# Altium PCB DaGooseBox_2022-08-19.pcbdoc
Units mm, origin at the board's own origin, x right, y up, seen from the top; angles counter-clockwise.
Board outline 135.65 x 95.65 mm, 2 copper layers (Top Layer, Bottom Layer); 48 components, 39 nets, 138 pads, 3 vias.
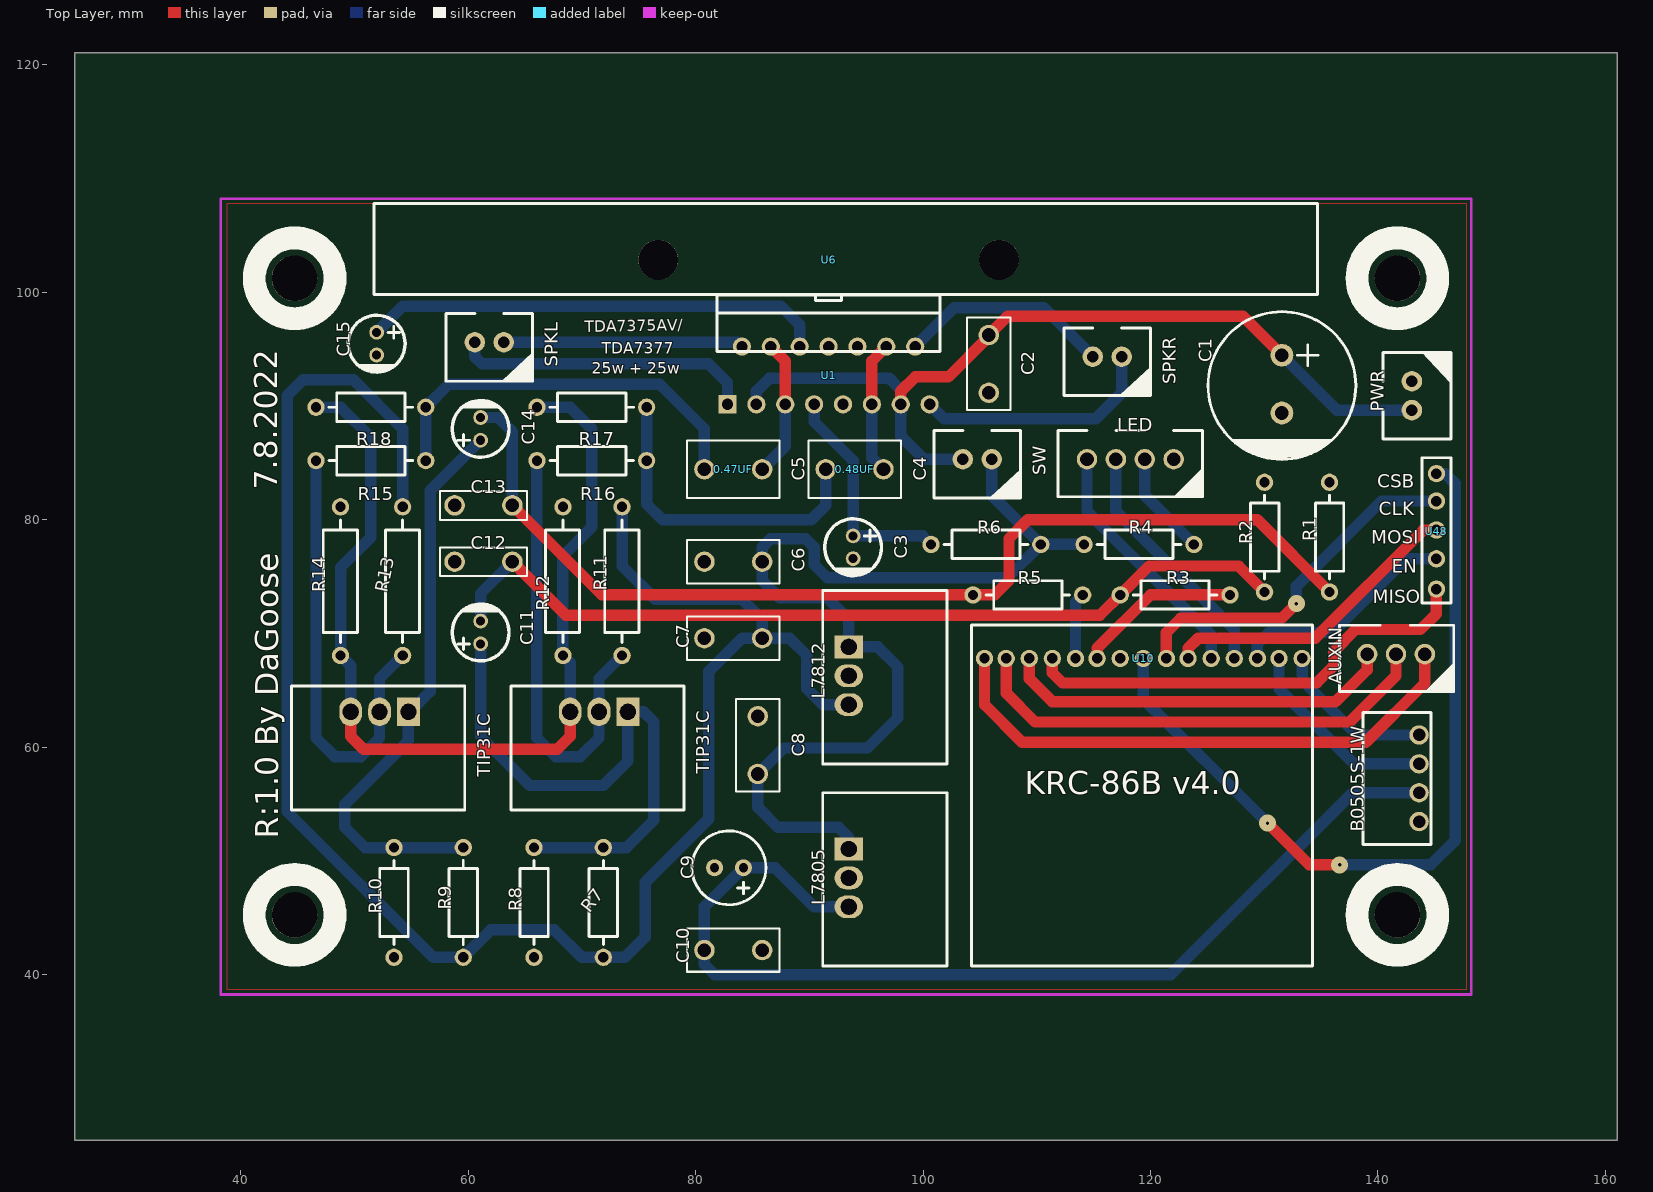
[diagram p0: Top Layer view]
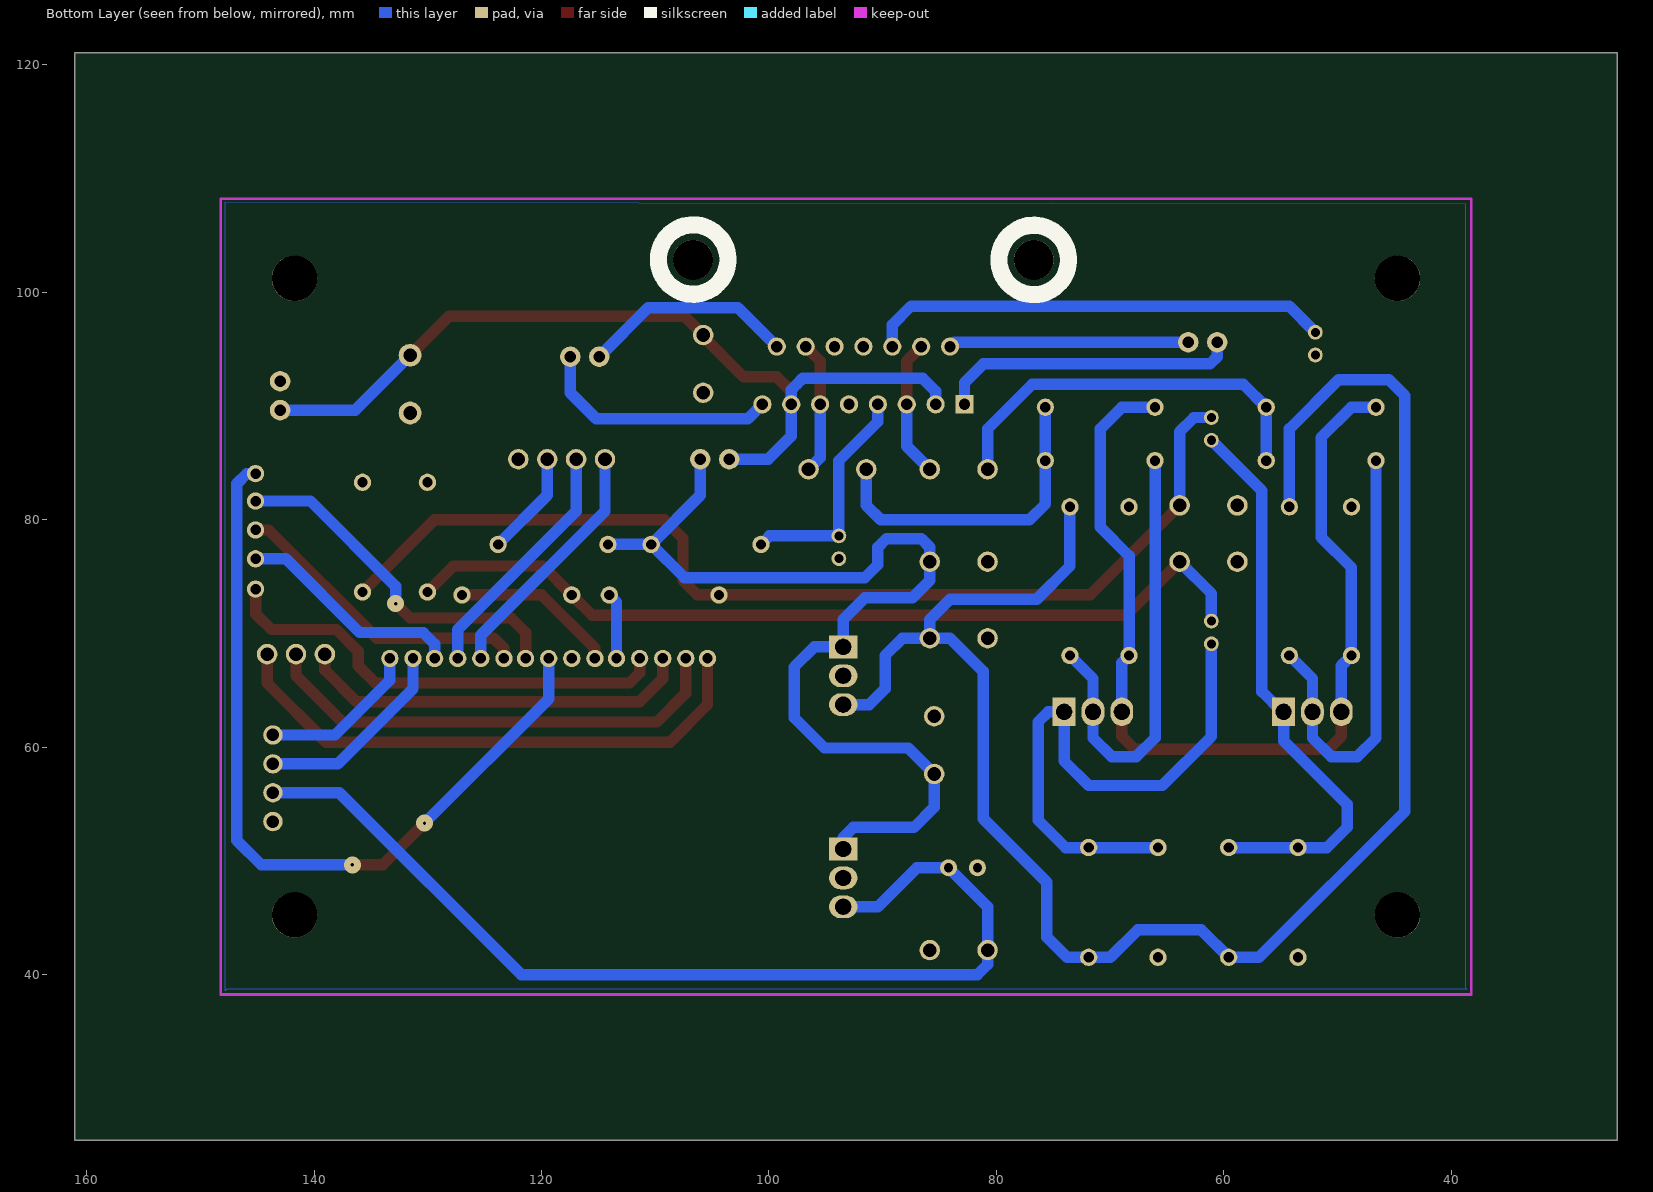
[diagram p1: Bottom Layer view, seen from below]

## Layer stack, top to bottom
Top Layer: signal copper (thickness not stored)
Dielectric: dielectric 0.32, FR-4, Dk 4.8
Bottom Layer: signal copper (thickness not stored)

## Board outline
161.054,25.4 25.4,25.4 25.4,121.054 161.054,121.054

## Components (designator, comment, footprint, x,y, rotation, side; value= is the part's Value field where it differs from the comment)
0.47UF "RAD-0.2" RAD-0.2 83.312,84.427 r90 top
0.48UF "RAD-0.2" RAD-0.2 93.98,84.427 r90 top
AUXIN "XH2.54-3P" XH2.54-3P 136.525,67.409 r0 top
B0505S-1W "PWRM-TH_B0505S-1W" PWRM-TH_B0505S-1W 143.637,57.249 r90 top
C1 "2200UF" 2200UF 131.953,92.809 r270 top
C2 "MONOLITHIC_CAP" MONOLITHIC_CAP 105.791,93.571 r0 top
C3 "CAP-TH_BD5.0-P2.00-D0.8-FD" CAP-TH_BD5.0-P2.00-D0.8-FD 93.853,77.569 r270 top
C6 "MONOLITHIC_CAP" MONOLITHIC_CAP 83.439,76.299 r90 top
C7 "MONOLITHIC_CAP" MONOLITHIC_CAP 83.439,69.568 r90 top
C8 "MONOLITHIC_CAP" MONOLITHIC_CAP 85.471,60.043 r0 top
C9 "470UF10V" 470UF10V 84.201,52.423 r270 top
C10 "MONOLITHIC_CAP" MONOLITHIC_CAP 83.439,42.136 r90 top
C11 "CAP-TH_BD5.0-P2.00-D0.8-FD" CAP-TH_BD5.0-P2.00-D0.8-FD 61.087,70.076 r90 top
C12 "FILOM_CAP" FILOM_CAP 61.341,76.299 r0 top
C13 "FILOM_CAP" FILOM_CAP 61.341,81.252 r0 top
C14 "CAP-TH_BD5.0-P2.00-D0.8-FD" CAP-TH_BD5.0-P2.00-D0.8-FD 61.087,87.983 r90 top
C15 "CAP-TH_BD5.0-P2.00-D0.8-FD" CAP-TH_BD5.0-P2.00-D0.8-FD 51.943,95.476 r270 top
L7805 "TO-220" TO-220 97.409,45.819 r0 top
L7812 "TO-220" TO-220 97.409,63.599 r0 top
LED "XH2.54-4P" XH2.54-4P 114.427,84.554 r0 top
PWR "XH2.54-2P" XH2.54-2P 143.891,89.634 r90 top
R1 "1/4W" 1/4W 135.763,77.696 r90 top
R2 "1/4W" 1/4W 130.048,77.696 r90 top
R3 "1/4W" 1/4W 121.412,73.378 r0 top
R4 "1/4W" 1/4W 118.237,77.823 r0 top
R5 "1/4W" 1/4W 108.458,73.378 r0 top
R6 "1/4W" 1/4W 104.775,77.823 r0 top
R7 "1/4W" 1/4W 71.882,45.565 r90 top
R8 "1/4W" 1/4W 65.786,45.565 r90 top
R9 "1/4W" 1/4W 59.563,45.565 r90 top
R10 "1/4W" 1/4W 53.467,45.565 r90 top
R11 "1/2W" 1/2W 73.533,73.759 r90 top
R12 "1/2W" 1/2W 68.326,73.759 r90 top
R13 "1/2W" 1/2W 54.229,73.759 r90 top
R14 "1/2W" 1/2W 48.768,73.759 r90 top
R15 "1/4W" 1/4W 50.673,85.189 r0 top
R16 "1/4W" 1/4W 70.104,85.189 r0 top
R17 "1/4W" 1/4W 70.104,89.888 r0 top
R18 "1/4W" 1/4W 50.673,89.888 r0 top
SPKL "XH2.54-2P" XH2.54-2P 60.579,94.714 r0 top
SPKR "XH2.54-2P" XH2.54-2P 114.935,93.444 r0 top
SW "XH2.54-2P" XH2.54-2P 103.505,84.427 r0 top
TIP31C "TO-220" TO-220 68.834,59.154 r270 top
TIP31C "TO-220" TO-220 49.53,59.154 r270 top
U1 "MULTIWATT-15" MULTIWATT-15 91.694,92.682 r0 top
U6 "7375HEATSINK" 7375HEATSINK 87.127,107.795 r0 top
U10 "KRC-86B V4.0" "KRC-86B V4.0" 116.332,68.806 r0 top
U48 "KRC-86B SPI" "KRC-86B SPI" 146.431,77.823 r270 top

## Footprints (in the part's own frame and the unit in brackets; to place one, negate y for a bottom-side part, rotate by r counter-clockwise, add the part's x,y. Pads: shape width x height; smd on the part's side, far side on the other; paste and mask are expansions set on the pad)
1/2W [mil]
  round 60 hole 35.43: 1(-225,0) 2(290,0)
  silkscreen extent -180,-58 245,60
1/4W [mil]
  round 60 hole 35.43: 1(-160,0) 2(220,0)
  silkscreen extent -115,-49 175,49
470UF10V [mm]
  round 1.5 hole 0.8: 1(3.048,0) 2(3.048,-2.54)
  silkscreen extent -0.2,-4.52 6.3,1.98
2200UF [mm]
  round 2 hole 1.2: 1(-1.651,-0.381) 2(3.429,-0.381)
  silkscreen extent -5.48,-6.88 7.52,6.12
7375HEATSINK [mm]
  round 3.5 hole 3.5 unplated: ""(-10.414,-4.953) ""(19.558,-4.953)
  silkscreen extent -35.43,-8.51 47.57,0
CAP-TH_BD5.0-P2.00-D0.8-FD [mm]
  round 1.3 hole 0.8: 1(-1,0) 2(1,0)
  silkscreen extent -2.5,-2.5 2.5,2.5
FILOM_CAP [mm]
  round 1.8 hole 1.2: 1(-2.54,0) 2(2.54,0)
  silkscreen extent -3.81,-1.27 3.81,1.27
"KRC-86B SPI" [mil]
  round 60 hole 36: 1(-245,-50) 4(-150,-50) 5(-50,-50) 6(50,-50) 7(155,-50)
  silkscreen extent -300,-100 203,0
"KRC-86B V4.0" [mil]
  round 60 hole 36: 1(-430,-40) 2(-355,-40) 3(-275,-40) 4(-195,-40) 5(-115,-40) 6(-40,-40) 7(40,-40) 8(120,-40) 9(200,-40) 10(275,-40) 11(355,-40) 12(435,-40) 13(515,-40) 14(590,-40) 15(670,-40)
  silkscreen extent -476,-1106 706,76
MONOLITHIC_CAP [mm]
  round 1.8 hole 1.2: 1(0,2.667) 2(0,-2.413)
  silkscreen extent -1.91,-3.94 1.91,4.19
MULTIWATT-15 [mm]
  rect 1.6x1.6 hole 1: 1(-8.89,-2.54)
  round 1.6 hole 1: 2(-7.62,2.54) 3(-6.35,-2.54) 4(-5.08,2.54) 5(-3.81,-2.54) 6(-2.54,2.54) 7(-1.27,-2.54) 8(0,2.54) 9(1.27,-2.54) 10(2.54,2.54) 11(3.81,-2.54) 12(5.08,2.54) 13(6.35,-2.54) 14(7.62,2.54) 15(8.89,-2.54)
  silkscreen extent -9.8,2.09 9.8,7.09
PWRM-TH_B0505S-1W [mm]
  round 1.7 hole 1.1: 1(-3.81,0) 2(-1.27,0) 3(1.27,0) 4(3.81,0)
  silkscreen extent -5.81,-1.05 5.8,4.95
RAD-0.2 [mm]
  round 1.8 hole 1.2: 1(0,2.54) 2(0,-2.54)
  silkscreen extent -2.54,-4.06 2.54,4.06
TO-220 [mm]
  rect 2.5x2 hole 1.4 slot 1.405 at 0 deg: 1(-3.937,5.207)
  oval 2.5x2 hole 1.4 slot 1.405 at 0 deg: 2(-3.937,2.667) 3(-3.937,0.127)
  silkscreen extent -6.22,-5.08 4.7,10.16
XH2.54-2P [mm]
  round 1.8 hole 1: 1(2.54,0.889) 2(0,0.889)
  silkscreen extent -2.54,-2.54 5.08,3.43
XH2.54-3P [mm]
  round 1.8 hole 1.199: 1(7.62,0.762) 2(5.08,0.762) 3(2.54,0.762)
  silkscreen extent 0.13,-2.54 10.16,3.3
XH2.54-4P [mm]
  round 1.8 hole 1.199: 1(7.62,0.762) 2(5.08,0.762) 3(2.54,0.762) 4(0,0.762)
  silkscreen extent -2.54,-2.54 10.16,3.3

## Free pads (board coordinates)
  round 4 hole 4 unplated: ""(44.727,45.227) ""(44.727,101.227) ""(141.727,45.227) ""(141.727,101.227)

## Via types
v1: diameter 1.5, hole 0.305, Top Layer to Bottom Layer, tented both sides, 3 vias

## Nets (pads, with @x,y where several pads share a name; then routed paths per layer and width w, separated by ;. In a path a pad name is that pad's centre, name@x,y a point inside that pad or via, vN(x,y) a via of type N, cw(c..) or ccw(c..) an arc to the next point about the centre after c; other vN are vias at no path point)
GND: B0505S-1W.1 C1.2 C2.2 C3.2 C6.1 C7.1 C8.1 C9.2 C10.2 C15.2 L7805.2 L7812.2 LED.1 PWR.1 R1.2 R2.2 R8.1 R10.1 R12.2 R14.2 U1.8 U1.9 U10.7
S$86: 
S$88: 
S$2625: C15.1 U1.6 | length 40.8
  Bottom Layer w1: C15.1 54.245,98.778 87.503,98.778 89.154,97.127 U1.6
S$3954: C14.1 R9.2 R10.2 TIP31C.1@54.737,63.091 | length 50.2
  Bottom Layer w1: R9.2 R10.2 50.927,51.153 49.149,52.931 49.149,54.963 54.737,60.551 54.737,63.091 54.864,63.091 56.642,64.869 56.642,82.537 C14.1
S$11154: C7.2 L7812.3 R7.1 R9.1 R11.2 R13.2 | length 160
  Bottom Layer w1: R13.2 54.229,87.983 49.911,92.301 45.466,92.301 44.069,90.904 44.069,54.328 56.896,41.501 R9.1 61.976,43.914 67.564,43.914 69.977,41.501 R7.1 73.787,41.501 75.565,43.279 75.565,48.105 81.153,53.693 81.153,66.647 84.074,69.568 C7.2 ; R11.2 73.533,75.918 76.454,72.997 84.074,72.997 85.852,71.219 C7.2 ; L7812.3 91.186,63.726 89.789,65.123 89.789,68.044 88.265,69.568 C7.2
S$11165: C11.1 R7.2 R8.2 TIP31C.1@74.041,63.091 | length 50.9
  Bottom Layer w1: C11.1 61.087,60.932 65.405,56.614 71.882,56.614 74.041,58.773 74.041,63.091 75.438,63.091 76.327,62.202 76.327,53.566 73.914,51.153 R7.2 R8.2
S$12565: B0505S-1W.2 C9.1 C10.1 L7805.3 | length 90.5
  Bottom Layer w1: L7805.3 90.424,45.946 86.995,49.375 C9.1 80.772,45.946 C10.1 80.772,40.866 81.661,39.977 121.793,39.977 137.795,55.979 B0505S-1W.2
S$12572: C6.2 C8.2 L7805.1 L7812.1 R4.1 R6.2 SW.1 | length 92.7
  Bottom Layer w1: L7805.1 93.472,52.042 92.583,52.931 87.249,52.931 85.471,54.709 C8.2 87.757,59.916 95.123,59.916 97.79,62.583 97.79,67.028 96.012,68.806 L7812.1 93.472,71.219 91.567,73.124 87.376,73.124 85.852,74.648 C6.2 85.852,77.569 86.614,78.331 89.662,78.331 90.424,77.569 90.424,76.045 91.567,74.902 107.442,74.902 R6.2 ; SW.1 106.045,82.141 R6.2 ; R4.1 R6.2
S$12579: C1.1 C2.1 PWR.2 SW.2 U1.3 U1.13 | length 77.4
  Top Layer w1: U1.13 98.044,91.285 99.314,92.555 102.235,92.555 105.791,96.111 C2.1 107.442,97.889 128.143,97.889 C1.1
  Bottom Layer w1: U1.3 85.344,91.285 86.487,92.428 97.028,92.428 97.574,91.882 98.044,91.412 U1.13 98.044,87.348 100.076,85.316 SW.2 ; C1.1 136.398,89.634 PWR.2
S$12880: B0505S-1W.4 U10.15 | length 14.2
  Bottom Layer w1: U10.15 133.35,65.885 138.176,61.059 B0505S-1W.4
S$12884: B0505S-1W.3 U10.14 | length 17.7
  Bottom Layer w1: U10.14 131.318,65.123 137.922,58.519 B0505S-1W.3
S$13200: R11.1 R16.1 TIP31C.2@71.501,63.091 | length 39.3
  Bottom Layer w1: R16.1 66.04,60.805 67.691,59.154 69.85,59.154 71.501,60.805 71.501,63.091 71.501,66.012 R11.1
S$13204: R12.1 R14.1 R17.1 R18.1 TIP31C.3 | length 87.9
  Top Layer w1: TIP31C.3@49.657,63.091 49.657,60.932 50.8,59.789 67.818,59.789 68.961,60.932 TIP31C.3@68.961,63.091
  Bottom Layer w1: R18.1 48.768,89.888 51.435,87.221 51.435,78.458 48.768,75.791 R14.1 49.657,67.155 TIP31C.3@49.657,63.091 ; R17.1 68.961,89.888 70.866,87.983 70.866,79.347 68.326,76.807 R12.1 68.961,67.409 TIP31C.3@68.961,63.091
S$13208: R13.1 R15.1 TIP31C.2@52.197,63.091 | length 39.4
  Bottom Layer w1: R15.1 46.609,60.805 48.26,59.154 50.546,59.154 52.197,60.805 52.197,63.091 52.197,66.012 R13.1
S$13348: 0.47UF.2 U1.4 U1.5 | length 12.2
  Top Layer w1: U1.4 87.884,93.952 U1.5
  Bottom Layer w1: 0.47UF.2 87.884,86.459 U1.5
S$13352: 0.48UF.2 U1.11 U1.12 | length 11.7
  Top Layer w1: U1.11 95.504,93.952 U1.12
  Bottom Layer w1: U1.11 95.504,85.443 0.48UF.2
S$14184: SPKL.1 U1.2 | length 21.1
  Bottom Layer w1: SPKL.1 83.693,95.603 U1.2
S$14188: SPKL.2 U1.1 | length 26.3
  Bottom Layer w1: SPKL.2 60.579,94.333 61.214,93.698 81.153,93.698 82.804,92.047 U1.1
S$15305: 0.48UF.1 R16.2 R17.2 | length 28.5
  Bottom Layer w1: R17.2 R16.2 75.692,81.379 77.089,79.982 90.17,79.982 91.44,81.252 0.48UF.1
S$15321: SPKR.1 U1.15 | length 21.5
  Bottom Layer w1: U1.15 101.854,88.872 115.189,88.872 117.475,91.158 SPKR.1
S$15325: SPKR.2 U1.14 | length 18.8
  Bottom Layer w1: U1.14 102.743,98.651 110.617,98.651 SPKR.2
S$15329: 0.47UF.1 R15.2 R18.2 | length 35.2
  Bottom Layer w1: R15.2 R18.2 58.293,91.92 76.835,91.92 80.772,87.983 0.47UF.1
S$16492: LED.2 R4.2 | length 9.3
  Bottom Layer w1: LED.2 119.507,82.141 R4.2
S$16496: LED.3 U10.12 | length 21.8
  Bottom Layer w1: LED.3 116.967,80.744 127.381,70.33 U10.12
S$16500: LED.4 U10.11 | length 22.1
  Bottom Layer w1: LED.4 114.427,80.744 125.349,69.822 U10.11
S$16771: AUXIN.1 U10.1 | length 48.9
  Top Layer w1: U10.1 105.41,63.726 108.712,60.424 138.938,60.424 144.145,65.631 AUXIN.1
S$16775: AUXIN.2 U10.2 | length 42
  Top Layer w1: U10.2 107.315,64.742 109.855,62.202 137.541,62.202 141.605,66.266 AUXIN.2
S$16779: AUXIN.3 U10.3 | length 34.9
  Top Layer w1: U10.3 109.347,66.012 111.379,63.98 136.271,63.98 139.065,66.774 AUXIN.3
S$16783: R5.2 U10.5 | length 5.9
  Bottom Layer w1: U10.5 113.411,72.743 R5.2
S$16787: C13.2 C14.2 R1.1 R5.1 | length 92.5
  Top Layer w1: C13.2 71.755,73.378 R5.1 106.299,73.378 107.569,74.648 107.569,78.331 109.22,79.982 129.413,79.982 R1.1
  Bottom Layer w1: C14.2 62.626,88.984 63.881,87.729 C13.2
S$16791: R3.2 U10.6 | length 14.5
  Top Layer w1: U10.6 115.316,68.679 120.015,73.378 R3.2
S$16807: C11.2 C12.2 R2.1 R3.1 | length 77.2
  Top Layer w1: C12.2 68.58,71.6 115.57,71.6 R3.1 119.888,75.918 127.762,75.918 R2.1
  Bottom Layer w1: C11.2 61.087,73.505 C12.2
S$16820: U10.4 U48.7 | length 40.8
  Top Layer w1: U10.4 111.379,66.52 112.268,65.631 134.62,65.631 136.144,67.155 136.144,68.425 138.049,70.33 143.764,70.33 145.161,71.727 U48.7
S$16833: U10.13 U48.6 | length 20.1
  Bottom Layer w1: U10.13 129.413,69.06 130.429,70.076 136.017,70.076 142.494,76.553 U48.6
S$16936: U10.10 U48.5 | length 27
  Top Layer w1: U10.10 123.317,68.679 124.206,69.568 134.493,69.568 144.018,79.093 U48.5
S$16979: U10.9 U48.4 | length 31.7
  Top Layer w1: U10.9 121.412,70.076 122.682,71.346 131.572,71.346 v1(132.842,72.616)
  Bottom Layer w1: v1(132.842,72.616) 132.842,74.14 140.335,81.633 U48.4
S$17022: U10.8 U48.1 | length 71.3
  Top Layer w1: v1(130.302,53.312) 133.985,49.629 v1(136.652,49.629)
  Bottom Layer w1: U10.8 119.38,64.234 v1(130.302,53.312) ; v1(136.652,49.629) 144.653,49.629 146.812,51.788 146.812,83.157 145.923,84.046 U48.1
S$17122: C3.1 R6.1 U1.7 | length 20.2
  Bottom Layer w1: U1.7 90.424,88.618 93.853,85.189 C3.1 99.965,78.569 R6.1
pads on no net: C12.1 C13.1 U1.10 U6.

## Polygon pours and split planes (outlines as drawn)
GND on Bottom Layer (solid): 38.735,107.795 38.735,38.834 38.608,38.707 147.701,38.707 147.828,38.58 147.828,107.922
GND on Top Layer (solid): 38.735,107.795 38.735,38.707 147.828,38.707 147.828,107.795

## Silkscreen, mask and mechanical layers (free items; w line width, h text height)
Top Overlay:
  circle w2: c44.727,101.227 r3.556
  circle w2: c141.727,101.227 r3.556
  circle w2: c44.727,45.227 r3.556
  circle w2: c141.727,45.227 r3.556
  text "TDA7375AV/" at 70.24,96.5 h1 r1
  text "TDA7377" at 71.755,94.595 h1
  text "25w + 25w" at 70.866,92.817 h1
  text "C5" at 89.599,83.411 h1.14 r90
  text "C4" at 100.266,83.411 h1.14 r90
  text "7.8.2022" at 43.18,82.649 h2.03 r90
  text "R:1.0 By DaGoose" at 43.307,51.915 h2.03 r90
Bottom Overlay:
  circle w1.5: c106.675,102.878 r3.053
  circle w1.5: c76.713,102.842 r3.053
Document:
  lines w0.003: 93.227,73.227 93.227,73.227

## Text inside footprints (layer, text, board x,y; h text height)
U10: Top Overlay "KRC-86B v4.0" at 108.966,55.852 h2.03
U48: Top Overlay "MISO" at 139.573,72.651 h1.2; Top Overlay "CSB" at 139.954,82.811 h1.2; Top Overlay "CLK" at 140.081,80.398 h1.2; Top Overlay "MOSI" at 139.446,77.858 h1.2; Top Overlay "EN" at 141.224,75.318 h1.2